# EAGLE board Smart Home Automation and Monitoring System with IoT Integration (EAGLE 9.7.0)

Size 253.01 x 114.37 mm. Coordinates in mm from the lower left corner, seen from the top.
Outline: 0,0 253.01,0 253.01,114.37 0,114.37 0,0
Copper layers (1*16): Top 0.035mm / dielectric 1.5mm / Bottom 0.035mm
Design rules "default": minimum track width 6mil, minimum drill 0.35mm, track to track 6mil, track to pad 6mil, pad to pad 6mil, via to via 6mil, smd to smd 6mil, copper to edge 40mil, drill to drill 6mil, minimum pad ring 10mil, minimum via ring 8mil, stop-mask expansion 4mil, vias tented up to drill 0mil, thermal gap 10mil

## Footprints (pad centres in the part's own frame; a part is rotated, then mirrored left to right if it is on the bottom)
LEDRD254W60D565H860B = drill 0.981 pad 1.581: 1 -1.27,0; 2 1.27,0
MQ-XX-SOCKET = drill 1.27: 1 -6.223,6.223; 2 -8.788,0; 3 -6.223,-6.223; 4 6.223,-6.223; 5 8.788,0; 6 6.223,6.223
LU-5-R = drill 0.8: 1 -6.35,-3.81; 5 3.81,-3.81; 6 6.35,-3.81; 7 6.35,3.81; 8 3.81,3.81; 12 -6.35,3.81
1X02 = drill 1.016 long: 1 -1.27,0; 2 1.27,0
MOTOR = drill 1.118 pad 3.15 octagon: + 2.54,0; - -2.54,0
BATTERY-GENERIC = drill 1.118 pad 3.15 octagon: + 2.54,0; - -2.54,0
PIEZO = drill 1 pad 1.6: 1 -3.5,0; 2 3.5,0
28015 = drill 1.016 long: 1 -2.54,0; 2 0,0; 3 2.54,0
28027 = drill 1.016 long: 1 -2.54,0; 2 0,0; 3 2.54,0
GL5528 = drill 0.8 pad 1.4: 1 -1.702,0; 2 1.702,0
RESAD1016W63L850D250B = drill 0.83 pad 1.43: 1 -5.08,0; 2 5.08,0
SWITCH-SPDT-PTH-8.5X3.7MM = drill 1.016 pad 1.88: 1 -2.54,0; 2 0,0; 3 2.54,0
SG90 = drill 1.016 long: 1 -2.54,0; 2 0,0; 3 2.54,0
ARDUINO-UNO-R3-SHIELD = drill 1.016 pad 1.88: 3.3V 24.13,-2.54; 5V 24.13,0; A0 24.13,12.7; A1 24.13,15.24; A2 24.13,17.78; A3 24.13,20.32; A4 24.13,22.86; A5 24.13,25.4; AREF -24.13,-13.97; D2 -24.13,20.32; D3 -24.13,17.78; D4 -24.13,15.24; D5 -24.13,12.7; D6 -24.13,10.16; D7 -24.13,7.62; D8 -24.13,3.81; D9 -24.13,1.27; D10 -24.13,-1.27; D11 -24.13,-3.81; D12 -24.13,-6.35; D13 -24.13,-8.89; GND@0 24.13,2.54; GND@1 24.13,5.08; GND@2 -24.13,-11.43; IOREF 24.13,-7.62; NC 24.13,-10.16; RES 24.13,-5.08; RX -24.13,25.4; SCL -24.13,-19.05; SDA -24.13,-16.51; TX -24.13,22.86; VIN 24.13,7.62
1X08 = drill 1.016 long: 1 -8.89,0; 2 -6.35,0; 3 -3.81,0; 4 -1.27,0; 5 1.27,0; 6 3.81,0; 7 6.35,0; 8 8.89,0
TO92 = drill 0.813 octagon: 1 -1.27,0; 2 0,1.905; 3 1.27,0

## Placement (x,y rotation side)
D1  RED  [LEDRD254W60D565H860B]  91.97,80.38 180 top
GAS1  GAS-SENSORMQ-XX-SOCKET  [MQ-XX-SOCKET]  169.31,46.74 180 top
K1  RELAY-SPDT_LU-5-R  [LU-5-R]  156.34,83.07 180 top
K2  RELAY-SPDT_LU-5-R  [LU-5-R]  213.39,91.49 180 top
L1  LIGHTBULB  [1X02]  208.34,104.52 0 top
M1  MOTOR_HDR  [MOTOR]  152.53,94.72 0 top
P1  BATTERYGENERIC  [BATTERY-GENERIC]  188.15,81.95 180 top
P2  BATTERYGENERIC  [BATTERY-GENERIC]  244.76,106.11 180 top
PIEZO1  PIEZO  [PIEZO]  157.88,25.15 270 top
PING1  DISTANCE-SENSOR-3PIN  [28015]  111.02,82.92 0 top
PIR1  PIR-SENSOR_28027  [28027]  57.68,100.7 0 top
R1  PHOTOCELL_GL5528  [GL5528]  79.27,100.7 0 top
R2  1k  [RESAD1016W63L850D250B]  78,90.54 90 top
R3  1k  [RESAD1016W63L850D250B]  155.34,56.9 90 top
R4  1k  [RESAD1016W63L850D250B]  242.23,33.54 270 top
R5  1k  [RESAD1016W63L850D250B]  242.23,23.38 270 top
S1  TOGGLE  [SWITCH-SPDT-PTH-8.5X3.7MM]  170.23,83.74 0 top
S2  TOGGLE  [SWITCH-SPDT-PTH-8.5X3.7MM]  222.43,105.58 0 top
SERVO1  SERVOSG90  [SG90]  19.46,87.1 180 top
U1  ARDUINO-UNO-R3-SHIELD  [ARDUINO-UNO-R3-SHIELD]  81.81,35.93 270 top
U2  PINHD-1X08_1X08M  [1X08]  13.41,15.97 0 top
U3  TMP36GT9Z_TO92  [TO92]  162.96,6.1 270 top

## Library data of the parts
D1 = Tinkercad; CATEGORY: Opto-Electronic; SUB-CATEGORY: LED; VALUE: LED_RED
GAS1 K1 K2 L1 M1 P1 P2 PIEZO1 PING1 PIR1 R1-R5 S1 S2 SERVO1 U1-U3 = Tinkercad

## Nets
L1_1: K2.6 L1.1
M1_+: M1.+ S1.1
M1_-: K1.6 M1.-
P1+: P1.+ S1.2
P1-: K1.12 P1.-
P2+: P2.+ S2.2
P2-: K2.12 P2.-
R5_1: R4.2 R5.1 U2.8
S2_O: L1.2 S2.1
U1_5V: GAS1.1 GAS1.2 GAS1.3 PING1.2 PIR1.2 R2.1 SERVO1.2 U1.5V U3.3
U1_A0: R1.1 R2.2 U1.A0
U1_A1: GAS1.4 GAS1.6 R3.1 U1.A1
U1_A2: U1.A2 U3.2
U1_D6: PIR1.1 U1.D6
U1_D7: SERVO1.3 U1.D7
U1_D8: PIEZO1.1 U1.D8
U1_D9: PING1.3 U1.D9
U1_D10: K1.8 U1.D10
U1_D11: D1.1 U1.D11
U1_D13: K2.8 U1.D13
U1_TX: R4.1 U1.TX
U2_1: U1.3.3V U2.1 U2.4 U2.5
U2_2: D1.2 GAS1.5 K1.5 K2.5 PIEZO1.2 PING1.1 PIR1.3 R1.2 R3.2 R5.2 SERVO1.1 U1.GND@0 U1.GND@1 U1.GND@2 U2.2 U3.1
U2_3: U1.RX U2.3

## Tracks (layer width: path | path; a pad name or v marks a point on that pad's centre or on a via)
L1_1  (1 unrouted)
M1_+  (1 unrouted)
M1_-  (1 unrouted)
P1+  (1 unrouted)
P1-  (1 unrouted)
P2+  (1 unrouted)
P2-  (1 unrouted)
R5_1  (2 unrouted)
S2_O  (1 unrouted)
U1_5V  (8 unrouted)
U1_A0  (2 unrouted)
U1_A1  (3 unrouted)
U1_A2  (1 unrouted)
U1_D6  (1 unrouted)
U1_D7  (1 unrouted)
U1_D8  (1 unrouted)
U1_D9  (1 unrouted)
U1_D10  (1 unrouted)
U1_D11  (1 unrouted)
U1_D13  (1 unrouted)
U1_TX  (1 unrouted)
U2_1  (3 unrouted)
U2_2  (15 unrouted)
U2_3  (1 unrouted)